# Allegro board LAN9500_TEST_V10A.brd
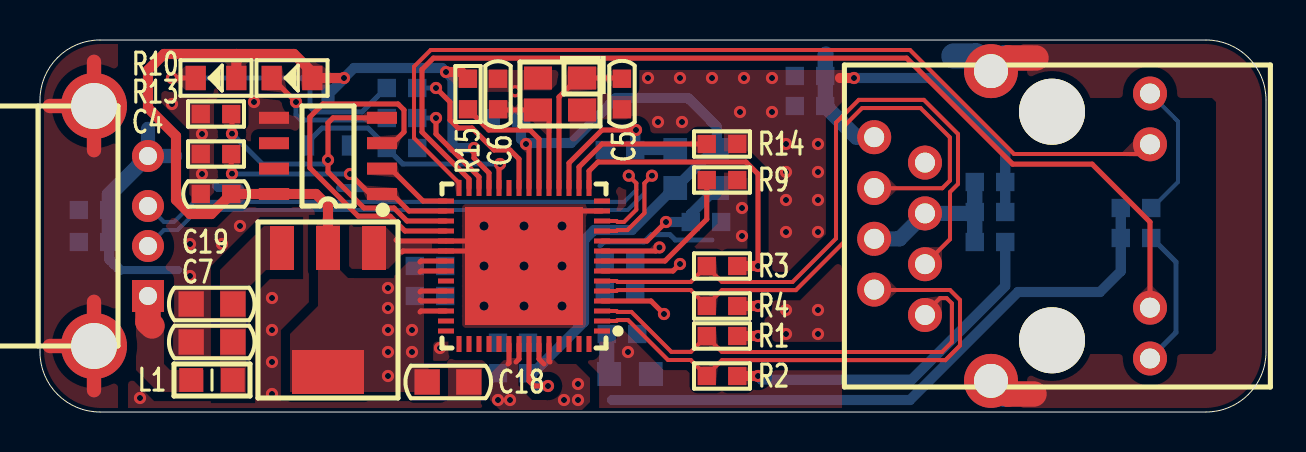
[diagram p0: board, top side]
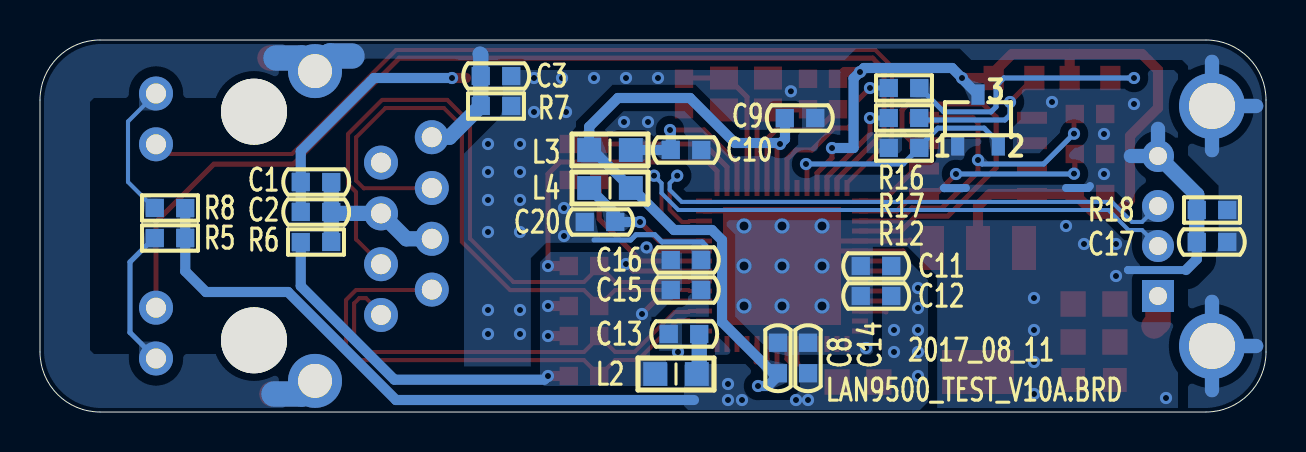
[diagram p1: board, bottom side, seen from below]

Outline 61.3 x 18.6 mm; copper layers: TOP, BOTTOM. Coordinates in mm from the lower left corner of the outline.
Outline path: 0,15.6 0,3 arc(0.88,0.88) 3,0 58.3,0 arc(60.42,0.88) 61.3,3 61.3,15.6 arc(60.42,17.72) 58.3,18.6 3,18.6 arc(0.88,17.72) 0,15.6

## Design rules (mm)
constraint set DEFAULT: min track width 0.203, pair gap 0.203
net group DP1: nets RXN RXP
net group DP2: nets TXN TXP
net group DP3: nets USBDM USBDP

## Placement (name value [footprint] x y rotation side)
C1  0.1uF_50V  [CC0603]  47.5 11.5 180 bottom
C2  1nF_50V  [CC0603]  47.5 10 180 bottom
C3  4.7nF_50V  [CC0603]  38.5 16.8 180 bottom
C4  0.1uF_50V  [CC0603]  8.8 10.9 0 top
C5  12pF_50V  [CC0603]  29.1 15.9 90 top
C6  12pF_50V  [CC0603]  22.9 15.9 270 top
C7  10uF_25V  [CC0805]  8.6 3.5 180 top
C8  0.1uF_50V  [CC0603]  24.4 2.7 270 bottom
C9  0.1uF_50V  [CC0603]  23.3 14.7 0 bottom
C10  0.1uF_50V  [CC0603]  29 13.1 0 bottom
C11  0.1uF_50V  [CC0603]  19.5 7.3 180 bottom
C12  0.1uF_50V  [CC0603]  19.5 5.8 180 bottom
C13  0.1uF_50V  [CC0603]  29.1 3.9 180 bottom
C14  0.1uF_50V  [CC0603]  22.9 2.7 270 bottom
C15  0.1uF_50V  [CC0603]  29 6.1 0 bottom
C16  0.1uF_50V  [CC0603]  29 7.6 0 bottom
C17  4.7nF_50V  [CC0603]  2.7 8.5 0 bottom
C18  10uF_25V  [CC0805]  20.4 1.5 0 top
C19  10uF_25V  [CC0805]  8.6 5.4 180 top
C20  0.1uF_50V  [CC0603]  33.3 9.5 180 bottom
D1  LED_GREEN/NI  [LED0805]  8.8 16.7 180 top
D2  LED_GREEN/NI  [LED0805]  12.6 16.7 180 top
J1  -  [HR911105A]  50.6 9.3 270 top
J2  -  [USB-A-MALE]  5.4 5.8 180 top
L1  BEAD_BLM21PG600  [LC0805]  8.6 1.6 0 top
L2  BEAD_BLM21PG600  [LC0805]  29.5 1.9 0 bottom
L3  BEAD_BLM21PG600  [LC0805]  32.8 13.1 180 bottom
L4  BEAD_BLM21PG600  [LC0805]  32.8 11.2 0 bottom
NOREF  -  []  -0.21 0 0 top
NOREF#2  -  []  0 0 0 top
NOREF#3  -  []  0 0 90 top
R1  49.9R  [RC0603]  34.1 3.8 180 top
R2  49.9R  [RC0603]  34.1 1.8 180 top
R3  49.9R  [RC0603]  34.1 7.3 180 top
R4  49.9R  [RC0603]  34.1 5.3 180 top
R5  309R  [RC0603]  54.8 8.7 180 bottom
R6  0R  [RC0603]  47.5 8.5 0 bottom
R7  10M  [RC0603]  38.5 15.3 180 bottom
R8  309R  [RC0603]  54.8 10.2 180 bottom
R9  12K  [RC0603]  34.1 11.6 180 top
R10  10K/NI  [RC0603]  8.8 14.9 180 top
R12  100K  [RC0603]  18.1 13.2 180 bottom
R13  10K  [RC0603]  8.8 12.9 180 top
R14  12K  [RC0603]  34.1 13.4 180 top
R15  0R  [RC0603]  21.4 15.9 270 top
R16  309R/NI  [RC0603]  18.1 16.2 0 bottom
R17  309R/NI  [RC0603]  18.1 14.7 0 bottom
R18  10M  [RC0603]  2.7 10.1 0 bottom
U1  LAN9500AI-ABZJ-TR  [QFN-56]  24.2 7.3 90 top
U2  MAX809SN293D3T1G  [SOT23_123]  14.4 14.6 180 bottom
U3  AT93C46DN-SH-T/NI  [SOIC8]  14.4 12.8 90 top
U4  AMS1117-3.3  [SOT-223]  14.4 5.1 180 top
Y1  X322525MOB4SI  [X-4P-3R2X2R5-SMD]  26 15.9 180 top

## Library data of the parts
C1-C20 = CAP NP_2
D1 D2 = LED_4
J1 = CON_RJ45_1X8_F_RA_0
J2 = USB-A-MALE
L1-L4 = IND_BEAD_0805_600OHM_200MA
R1-R10 R12-R18 = R_Generic
U1 = LAN9500AI-ABZJ-TR_0
U2 = MAX809_0
U3 = AT93C46DN-SH-T
U4 = AMS1117-3.3
Y1 = X322525MOB4SI

## Footprints (pads in the part's own frame, mm; a bottom-side part is the same pattern mirrored in y, then rotated)
CC0603
  rect 0.914x0.914 smd: 1(-0.762,0) 2(0.762,0)
CC0805
  rect 1.27x1.27 smd: 1(-1.041,0) 2(1.041,0)
HR911105A
  round 3.3 hole 3.3 unplated: (-5.715,0) (5.715,0)
  round 1.699 hole 1.001: 1(4.45,-6.35) 2(3.18,-8.89) 3(1.91,-6.35) 4(0.64,-8.89) 5(-0.63,-6.35) 6(-1.9,-8.89) 7(-3.17,-6.35) 8(-4.44,-8.89) 9(6.625,4.9) 10(4.085,4.9) 11(-4.085,4.9) 12(-6.625,4.9)
  round 2.7 hole 1.7: 13(7.745,-3.05) 14(-7.745,-3.05)
LC0805
  rect 1.194x1.194 smd: 1(-1.041,0) 2(1.041,0)
LED0805
  rect 1.016x1.219 smd: 1(-1.016,0) 2(1.016,0)
QFN-56
  rect 0.25x0.8 smd: 1(-3.25,-3.9) 2(-2.75,-3.9) 3(-2.25,-3.9) 4(-1.75,-3.9) 5(-1.25,-3.9) 6(-0.75,-3.9) 7(-0.25,-3.9) 8(0.25,-3.9) 9(0.75,-3.9) 10(1.25,-3.9) 11(1.75,-3.9) 12(2.25,-3.9) 13(2.75,-3.9) 14(3.25,-3.9) 29(3.25,3.9) 30(2.75,3.9) 31(2.25,3.9) 32(1.75,3.9) 33(1.25,3.9) 34(0.75,3.9) 35(0.25,3.9) 36(-0.25,3.9) 37(-0.75,3.9) 38(-1.25,3.9) 39(-1.75,3.9) 40(-2.25,3.9) 41(-2.75,3.9) 42(-3.25,3.9)
  rect 0.8x0.25 smd: 15(3.9,-3.25) 16(3.9,-2.75) 17(3.9,-2.25) 18(3.9,-1.75) 19(3.9,-1.25) 20(3.9,-0.75) 21(3.9,-0.25) 22(3.9,0.25) 23(3.9,0.75) 24(3.9,1.25) 25(3.9,1.75) 26(3.9,2.25) 27(3.9,2.75) 28(3.9,3.25) 43(-3.9,3.25) 44(-3.9,2.75) 45(-3.9,2.25) 46(-3.9,1.75) 47(-3.9,1.25) 48(-3.9,0.75) 49(-3.9,0.25) 50(-3.9,-0.25) 51(-3.9,-0.75) 52(-3.9,-1.25) 53(-3.9,-1.75) 54(-3.9,-2.25) 55(-3.9,-2.75) 56(-3.9,-3.25)
  rect 5.9x5.9 smd: 57(0,0)
RC0603
  rect 0.914x0.914 smd: 1(-0.762,0) 2(0.762,0)
SOIC8
  rect 0.6x1.5 smd: 1(-1.9,-2.7) 2(-0.63,-2.7) 3(0.64,-2.7) 4(1.91,-2.7) 5(1.91,2.7) 6(0.64,2.7) 7(-0.63,2.7) 8(-1.9,2.7)
SOT23_123
  rect 0.66x1.016 smd: 1(-1.016,-1.27) 2(1.016,-1.27) 3(0,1.27)
SOT-223
  rect 1.2x2.2 smd: 1(-2.3,-3.1) 2(0,-3.1) 3(2.3,-3.1)
  rect 3.6x2.2 smd: 4(0,3.1)
USB-A-MALE
  rect 1.6x1.6 hole 0.9: 1(0,0)
  round 1.6 hole 0.9: 2(0,-2.5) 3(0,-4.5) 4(0,-7)
  round 3.3 hole 2.3: 5(2.7,2.5) 6(2.7,-9.5)
X-4P-3R2X2R5-SMD
  rect 1.4x1.15 smd: 1(-1.1,-0.8) 2(1.1,-0.8) 3(1.1,0.8) 4(-1.1,0.8)

## Nets
GND: C1.1 C2.1 C3.2 C4.1 C5.1 C6.1 C7.2 C8.1 C9.1 C10.1 C11.1 C12.1 C13.1 C14.1 C15.1 C16.1 C17.2 C18.2 C19.2 C20.1 J2.4 R7.2 R9.1 R10.2 R12.1 R13.2 R14.1 R18.2 U1.13 U1.33 U1.34 U1.57 U2.1 U3.5 U4.1 Y1.2 Y1.4
GND_EARTH: C3.1 C17.1 J1.8 J1.13 J1.14 J2.5 J2.6 R7.1 R18.1
VBUS_DET: R15.2 U1.20
VCC-USB: J2.1(VBUS) L1.1
VCC_3V3: C4.2 C11.2 C12.2 C13.2 C14.2 C18.1 D1.1 D2.1 L2.1 R5.2 R8.2 R15.1 U1.25 U1.35 U1.36 U1.38 U1.39 U1.40 U1.48 U1.49 U1.51 U1.52 U2.3(VCC) U3.8(VCC) U4.2 U4.4(OUT_2)
VCC_5V: C7.1 C19.1 L1.2(B) U4.3
VDD33A: C15.2 C16.2 L2.2(B) R1.1 R2.1 R3.1 R4.1 R6.2 U1.4 U1.7 U1.9 U1.15
VDD_CORE: C8.2 C9.2 L3.1 L4.1 U1.21 U1.50
VDDPLL: C20.2 L4.2(B) U1.10
VDDUSBPLL: C10.2 L3.2(B) U1.17
EECLK/PWR_SEL: U1.29 U3.2
EECS: R13.1 U1.30 U3.1
EEDI: U1.32 U3.3
EEDO/AUTOMDIX_EN: R10.1 U1.31 U3.4
NFDX_LED/GPIO8: R17.2 U1.26
NLNKA_LED/GPIO9: J1.10 U1.27
NRESET: R12.2 U1.24 U2.2
NSPD_LED/GPIO10: J1.11 U1.28
RXN: J1.6 R4.2 U1.5
RXP: J1.3 R3.2 U1.6
TXN: J1.2 R2.2 U1.2
TXP: J1.1(TXP1) R1.2 U1.3
USBDM: J2.2 U1.11
USBDP: J2.3 U1.12
XI: C5.2 U1.18 Y1.1
XO: C6.2 U1.19(XO) Y1.3(X2)
N16792268: R9.2 U1.8
N16792367: R14.2 U1.16
N16793057: D1.2(CATHODE) R16.1
N16793060: R16.2 U1.22
N16797773: D2.2(CATHODE) R17.1
N16921144: C1.2 C2.2 J1.4 J1.5 R6.1
N16923033: J1.9 R5.1
N16923631: J1.12 R8.1

Pads without a net: J1 7; U1 1 14 23 37 41 42 43 44 45 46 47 53 54 55 56; U3 6 7

## Via types
v1: diameter 0.61, hole 0.305, TOP to BOTTOM, 77 vias
v2: diameter 0.762, hole 0.457, TOP to BOTTOM, 9 vias

## Routing (per net, layer and track width the routed paths; a pad name or vN(x,y) marks a point on that pad's centre or on a via; arc(x,y) is an arc through that point)
GND: length 50.8
  TOP w0.254: 17.8,8.6 17.85,8.55 U1.33 22.95,8.55 23.45,8.05 ; 23.45,8.05 U1.34 18.15,8.05 18.1,8 ; 23.45,8.05 v2(24.2,7.3) 26.95,10.05 U1.13
  TOP w0.508: v1(40.7,16.7) 40,16.7
  BOTTOM w0.254: 33.6,8.6 31.77,8.6 31.5,8.87 30.57,8.87 30.2,8.5 28.19,8.5 28,8.31
  BOTTOM w0.4: 15,11.2 15.2,11.2 15.21,11.19 16.09,11.19 16.1,11.2 ; 6.9,7.1 6.9,7.1 4,7.1 4,7.1 ; 8.8,11.3 8.9,11.2 10,11.2
  BOTTOM w0.508: C17.2 3.46,7.64 4,7.1 ; v1(40.7,16.7) 44.6,16.7 48.26,13.04 C1.1 C2.1
  BOTTOM w0.711: 5.4,14.16 J2.4 6.76,12.8
  BOTTOM w0.762: C17.2 R18.2 3.46,10.86 J2.4
  vias: v1(5,0.7) v1(6.6,15.4) v1(7.5,8.4) v1(7.5,6.8) v1(8.1,13.9) v1(8.1,11.9) v1(9.1,8.4) v1(10,9.3) v1(10.7,15.5) v1(11.6,5.7) v1(11.6,4.1) v1(11.6,2.5) v1(11.6,0.9) v1(20,3.2) v1(23.75,16.04) v1(29.4,3) v1(30.4,16.7) v1(30.9,14.5) v1(32,16.7) v1(32.1,14.5) v1(33.6,16.7) v1(35,15) v1(35.1,10.2) v1(35.1,8.8) v1(35.2,16.7) v1(36.6,16.7) v1(36.6,15) v1(37.3,13.4) v1(37.3,12) v1(37.3,10.6) v1(37.3,9) v1(37.3,5.1) v1(37.3,3.9) v1(38.9,13.4) v1(38.9,12) v1(38.9,10.6) v1(38.9,9) v1(38.9,5.1) v1(38.9,3.9) v2(22.2,9.3) v2(22.2,7.3) v2(22.2,5.3) v2(24.2,9.3) v2(24.2,5.3) v2(26.1,9.3) v2(26.1,7.3) v2(26.1,5.3)
GND_EARTH: length 43.9
  TOP w0.711: J2.6 2.7,17.51 ; J2.6 0.49,15.3 ; J2.6 2.7,13.09 ; 2.7,1.09 J2.5 ; J2.5 2.7,5.51 ; J2.5 0.49,3.3
  TOP w1.27: 49.8,17.7 48.4,17.7 47.74,17.05 J1.14 ; J1.13 47.74,1.55 48.4,0.9 49.7,0.9
  BOTTOM w0.711: J2.6 2.7,17.51 ; J2.6 2.7,13.09 ; J2.6 0.49,15.3 ; 2.7,1.09 J2.5 ; J2.5 2.7,5.51 ; J2.5 0.49,3.3
  BOTTOM w0.762: 39.3,17.9 39.26,17.86 C3.1 R7.1 40.82,13.74 J1.8
  BOTTOM w1.27: J1.14 47.55,17.05 ; 47.55,17.05 46.8,17.8 45.7,17.8 ; 47.55,17.05 48.2,17.7 49.5,17.7 ; 49.6,0.9 48.2,0.9 47.55,1.55 J1.13
VBUS_DET: length 6.6
  TOP w0.254: R15.2 22.44,14.1 24.5,14.1 24.95,13.65 U1.20
VCC-USB: length 1.6
  TOP w1.27: 5.6,4.3 5.4,4.5 J2.1
VCC_3V3: length 88.8
  TOP w0.254: 25.5,2.5 25.45,2.55 U1.52 ; 19,7.5 19.05,7.55 U1.35 ; 19,6 19.05,6.05 U1.38 ; 19,5.6 19.05,5.55 U1.39 ; 23.4,2.4 23.45,2.45 U1.48 ; U1.36 19.05,7.05 19,7 ; 23.8,2.5 23.95,2.65 U1.49 ; 25.2,2.4 24.95,2.65 U1.51 ; U1.40 19.05,5.05 19,5 ; v1(21.7,13.2) 21.7,12.7 22.45,11.95 U1.25
  TOP w0.508: U4.2 14.4,10.3 13.8,10.9 U3.8 C4.2 8.56,9.9 7.51,9.9 6.8,10.61 6.8,13.8 5.4,15.2 5.4,17.1 6.2,17.9 9.82,17.9 ; 9.82,17.9 D1.1 ; 9.82,17.9 12.7,17.9 13.62,16.98 D2.1 v1(15.2,16.7) ; v1(20.3,17) 21.06,17 R15.1
  BOTTOM w0.508: 28.6,0.6 43.5,0.6 48.9,6 53,6 54.04,7.04 R5.2 R8.2 ; v1(21.7,13.2) 20.62,13.2 20.62,16.68 v1(20.3,17) 20.1,17.2 15.7,17.2 v1(15.2,16.7) 15.2,16.67 U2.3
  BOTTOM w0.762: C13.2 28.34,2.02 L2.1
  vias: v1(17.4,6.2) v1(17.4,5.2) v1(17.4,4.1) v1(17.4,3) v1(17.4,1.8) v1(18.6,4.1) v1(18.6,3) v1(22.9,0.6) v1(23.5,0.6) v1(26.2,0.6) v1(26.9,1.4) v1(26.9,0.6)
VDD33A: length 45.4
  TOP w0.254: U1.4 30.55,5.55 v1(31.2,4.9) ; U1.15 27.45,12.05 27.9,12.5 35.3,12.5 35.9,11.9 v1(35.9,7.3) ; v1(30.97,8.23) 30.8,8.05 U1.9 ; U1.7 31.65,7.05 v1(32,7.4)
  TOP w0.508: R3.1 v1(35.9,7.3) ; R1.1 v1(35.9,3.8) ; R4.1 v1(35.9,5.3) ; R2.1 v1(35.9,1.8)
  BOTTOM w0.508: R6.2 48.26,6.3 43.58,1.62 36.08,1.62 v1(35.9,1.8)
VDD_CORE: length 36.6
  TOP w0.254: U1.50 24.45,1.55 24.7,1.3 v1(25.4,1.3) ; U1.21 24.45,13.25 v1(24.3,13.4)
  BOTTOM w0.508: v1(25.4,1.3) 24.91,1.3 24.4,1.81 C8.2 24.64,1.94 27.2,4.5 27.2,8.59 27.71,9.1 29.6,9.1 31.7,11.2 L4.1 33.66,13.1 L3.1 33.84,14.26 32.4,15.7 28.8,15.7 26.55,13.45 24.35,13.45 v1(24.3,13.4) 24.05,13.65 24.05,14.69 C9.2
VDDPLL: length 7.1
  TOP w0.254: v1(31.3,9.5) 30.35,8.55 U1.10
  BOTTOM w0.508: v1(31.3,9.5) C20.2 32.54,9.9 L4.2
VDDUSBPLL: length 8.3
  TOP w0.254: v1(29.8,14.1) 28.1,14.1 26.45,12.45 U1.17
  BOTTOM w0.508: L3.2 C10.2 29.76,14.06 v1(29.8,14.1)
EECLK/PWR_SEL: length 3.9
  TOP w0.254: U3.2 17.53,12.17 19.15,10.55 U1.29
EECS: length 12.5
  TOP w0.254: v1(15.5,11.9) 16.5,10.9 U3.1 17.6,10.9 18.45,10.05 U1.30 ; R13.1 9.56,11.95 v1(9.6,11.92)
  BOTTOM w0.254: v1(9.6,11.92) 9.62,11.9 v1(15.5,11.9)
EEDI: length 18.2
  TOP w0.254: U3.3 17.64,13.44 18.2,14 18.2,15.1 17.9,15.4 14.14,15.4 13.49,14.75 13.49,12.21 15.91,9.79 17.51,9.79 18.25,9.05 U1.32
EEDO/AUTOMDIX_EN: length 18.7
  TOP w0.254: U1.31 18.35,9.55 17.7,10.2 16.2,10.2 14.4,12 v1(14.4,12.6) 14.4,14.46 14.65,14.71 U3.4 ; R10.1 9.56,14.8 9.6,14.76 v1(9.6,13.92)
  BOTTOM w0.254: v1(14.4,12.6) 14.2,12.4 11.12,12.4 v1(9.6,13.92)
NFDX_LED/GPIO8: length 5.3
  TOP w0.254: U1.26 21.95,11.75 19.8,13.9 v1(19.8,14.7)
  BOTTOM w0.254: v1(19.8,14.7) R17.2
NLNKA_LED/GPIO9: length 51.2
  TOP w0.254: J1.10 55.5,9.5 52.61,12.39 48.63,12.39 43.33,17.69 19.67,17.69 19.1,17.13 19.1,14 21.45,11.65 U1.27
NRESET: length 12.1
  TOP w0.254: v1(23,12.4) 22.95,12.35 U1.24
  BOTTOM w0.254: U2.2 13.38,13.48 14.09,14.19 16.41,14.19 17.34,13.26 R12.2 18.14,12.4 v1(23,12.4)
NSPD_LED/GPIO10: length 46.5
  TOP w0.203: U1.28 20.95,11.45 18.7,13.7 18.7,17.26 19.54,18.1 43.5,18.1 48.7,12.9 55.02,12.9 55.5,13.38
RXN: length 32
  TOP w0.203: U1.5 28.83,6.05 28.87,6.1 32.54,6.1 R4.2 33.34,5.33 34.1,6.09 37.79,6.09 40.21,8.51 40.21,14.3 41.11,15.2 44.03,15.2 45.49,13.73 45.49,11.57 45.11,11.19 41.72,11.19 J1.6
RXP: length 33.6
  TOP w0.203: J1.3 45.5,8.64 45.5,11 45.9,11.4 45.9,13.9 44.19,15.61 40.94,15.61 39.8,14.47 39.8,8.67 37.63,6.5 34.1,6.5 33.34,7.26 R3.2 32.54,6.5 28.87,6.5 28.83,6.55 U1.6
TXN: length 26.5
  TOP w0.203: J1.2 41.73,6.1 45.5,6.1 46,5.6 46,3.33 45.27,2.59 34.1,2.59 33.34,1.83 R2.2 32.54,2.6 31.4,2.6 29.4,4.6 28.87,4.6 28.83,4.55 U1.2
TXP: length 23
  TOP w0.203: J1.1 44.25,4.94 45,5.69 45.33,5.69 45.59,5.43 45.59,3.49 45.1,3 34.1,3 33.34,3.76 R1.2 32.54,3.01 31.57,3.01 29.57,5 28.87,5 28.83,5.05 U1.3
USBDM: length 31.5
  TOP w0.203: v1(30.6,11.82) 30.22,11.44 30.22,9.95 29.37,9.1 28.87,9.1 28.83,9.05 U1.11
  BOTTOM w0.203: J2.2 6.2,9.1 6.87,9.1 7.87,10.1 29.38,10.1 30.22,10.94 30.22,11.44 v1(30.6,11.82)
USBDP: length 30.1
  TOP w0.203: U1.12 28.83,9.55 28.87,9.5 29.2,9.5 29.82,10.12 29.82,11.44 v1(29.44,11.82)
  BOTTOM w0.203: v1(29.44,11.82) 29.82,11.44 29.82,11.11 29.21,10.51 7.71,10.51 6.7,9.5 6.2,9.5 J2.3
XI: length 8.1
  TOP w0.254: C5.2 29.06,16.7 Y1.1 26.9,16.7 25.95,15.75 U1.18
XO: length 6.3
  TOP w0.254: C6.2 22.94,15.1 Y1.3 25.1,15.1 25.45,14.75 U1.19
N16792268: length 8.1
  TOP w0.254: U1.8 31.25,7.55 33.34,9.64 R9.2
N16792367: length 7.9
  TOP w0.254: R14.2 28.1,13.4 26.95,12.25 U1.16
N16793057: length 13.7
  TOP w0.254: v1(6.6,16.7) D1.2
  BOTTOM w0.254: R16.1 17.3,16.2 16.11,15.01 13.75,15.01 13.5,15.25 13.5,16.3 13.1,16.7 v1(6.6,16.7)
N16793060: length 8.5
  TOP w0.254: v1(19.8,16.2) 20.5,15.5 20.5,14.6 20.9,14.2 21.6,14.2 22.7,13.1 23.5,13.1 23.95,12.65 U1.22
  BOTTOM w0.254: R16.2 v1(19.8,16.2)
N16797773: length 7
  TOP w0.254: v1(12.8,15.5) 11.6,16.7 D2.2
  BOTTOM w0.254: v1(12.8,15.5) 12.8,14.85 13.05,14.6 17.24,14.6 R17.1
N16921144: length 8.6
  BOTTOM w0.762: J1.4 42.98,8.66 J1.5 46.67,9.93 C2.2 ; C2.2 C1.2 ; C2.2 R6.1
N16923033: length 7.1
  BOTTOM w0.254: J1.9 56.8,3.98 56.8,7.5 55.6,8.7 R5.1
N16923631: length 6.9
  BOTTOM w0.203: R8.1 55.6,10.2 56.9,11.5 56.9,14.53 J1.12

## Copper pours and planes (outline as drawn; the poured copper is in the pictures)
GND on TOP: 4.4,0.2 40.1,0.2 40.1,17.1 4.6,17.1 4.4,16.9 ; 8 cut-outs
GND on BOTTOM: 4.4,0.2 40.1,0.2 40.1,17.1 4.6,17.1 4.4,16.9 ; 1 cut-out
GND_EARTH on TOP: 47.6,0.2 58.3,0.2 60.26,1.04 61.1,3 61.1,15.6 60.25,17.55 58.3,18.4 47.5,18.4 47.5,15.7 58.6,15.7 58.8,15.5 58.8,3.1 58.6,2.9 47.6,2.9
GND_EARTH on BOTTOM: 3,0.2 1.04,1.04 0.2,3 0.2,15.6 1.05,17.55 3,18.4 58.3,18.4 60.25,17.55 61.1,15.6 61.1,3 60.26,1.04 58.3,0.2 47.6,0.2 47.6,2.9 58.6,2.9 58.8,3.1 58.8,15.5 58.6,15.7 47,15.7 45.1,17.6 4.2,17.6 3.9,17.3 3.9,0.2
VCC-USB on TOP: 4.8,4.8 4.8,2.1 5.9,1 8.2,1 8.2,2.1 6.5,2.1 6.2,2.4 6.2,4.8
VCC_3V3 on TOP: 23.3,2.7 22.5,1.9 22.5,0.6 23,0.1 27.1,0.1 27.5,0.5 27.5,1.7 26.8,2.4 25.9,2.4 25.6,2.7 24.9,2.7 24.8,2.6 24.8,1.9 25.5,1.2 25.5,0.7 25.4,0.6 24.6,0.6 24.1,1.1 24.1,2.7
VCC_3V3 on TOP: 12.5,1 12.5,3.9 13.9,5.3 13.9,9.4 15,9.4 15,7.1 15.4,6.7 17.6,6.7 18.6,7.7 19.2,7.7 19.2,2.4 19.5,2.1 19.9,2.1 19.9,1
VCC_3V3 on BOTTOM: 17.3,0.1 16.9,0.5 16.9,6.6 18.1,7.8 19.2,7.8 19.2,2.8 19.6,2.4 23.3,2.4 23.3,1.1 23.8,0.6 25.3,0.6 25.5,0.8 25.5,2.4 29.1,2.4 29.1,0.3 28.9,0.1
VCC_5V on TOP: 9,0.9 10.3,0.9 10.3,6.1 11.3,7.1 12.7,7.1 12.7,9.3 11.2,9.3 9,7.1
VDD33A on BOTTOM: 30.8,8.5 31.1,8.5 31.6,8 35.8,8 36.3,7.5 36.3,1.5 36.1,1.3 29.9,1.3 29.9,2.4 30,2.5 30,2.6 30.6,2.6 30.8,2.8 30.8,4.5 29.2,6.1 29.2,8.1 30.4,8.1
GND_EARTH on TOP: 3.9,0.2 3,0.2 1.04,1.04 0.2,3 0.2,15.6 1.05,17.55 3,18.4 3.9,18.4

Small or netless copper shapes (teardrops, artwork), in the pictures only: 68 on TOP, 44 on BOTTOM

## Text on the board
Ref Des/Silkscreen Bottom: 2017_08_11 | LAN9500_TEST_V10A.BRD
BODY_CENTER: SCALE: NONE | If the angle of PCB board outline is circular,please use this kind of break out area | If not use it,please delete it before you gerber out | If the angle of PCB board outline is right angle,please use this kind of break out area | AS usual,please use the 0.8MM stamp Via | A_TARGET:1.53 mm | ___ PUBI (PUBLIC INFORMATION) | ___ FIUO (HY INTERNAL USE ONLY) | ___ FCP (HY CONFIDENTIAL PROPRIETARY) | THIS DOCUMENT CONTAINS INFORMATION | PROPRIETARY TO FREESCALE AND SHALL | NOT BE USED FOR ENGINEERING DESIGN | PROCUREMENT OR MANUFACTURE IN WHOLE | OR IN PART WITHOUT THE CONSENT OF | NXP. | 1. THIS DRAWING SPECIFIES THE REQUIREMENTS FOR A | 2. THE PWB MUST BE LEAD FREE ASSEMBLY PROCESS COMPATIBLE AND MUST BE ABLE TO HANDLE | 3. BASE MATERIAL - LAMINATE AND PREPREG SHALL MEET IPC-4101B-26, 83 or 98 | Tg - MUST BE GREATER THAN OR EQUAL TO 150 DEGREES CELSIUS. | Td - MUST BE GREATER THAN OR EQUAL TO 330 DEGREES CELSIUS. | 4. COPPER FOIL WEIGHT - SEE STACKUP DETAIL 'A' | 5. CHARACTERISTIC IMPEDANCE - SEE DETAIL 'B' | 6. MINIMUM CONDUCTIVE WIDTH/SPACING TO BE .00X"/.00X" | 7. PLATING FINISH - BOTH SIDES ENIG (ELECTROLESS NICKEL IMMERSION GOLD): | 8. ALL THROUGH HOLE VIAS MAY BE PLATED SHUT. | - MUST BE UL RECOGNIZED AND MUST HAVE AN ID THAT CONFORMS TO UL94V-0 | 9. SOLDERMASK - GREEN COLOR (TAIYO OR EQUIVALENT), BOTH SIDES. | 10. SILKSCREEN - WHITE EPOXY INK, BOTH SIDES.  NO SILK ON PADS. | 11. ELECTRICAL TEST - 100% IPCD356. | 12. PRINTED WIRING BOARD IS TO BE INDIVIDUALLY BAGGED. | 13. DRC'S MUST BE RUN ON THE GERBER BEFORE BUILDING BOARDS, | UNLESS PRIOR APPROVAL IS GIVEN IN WRITING BY FREESCALE. | 14. ADD TEARDROPS TO ALL SIGNAL LAYERS. | 15. SOLDER SAMPLES TO BE PROVIDED. | 16. BASIC GRID INCREMENT AT 1:1 IS .0001. | 17. SUPPLIER MARKINGS - ON SOLDER SIDE ONLY, WHERE SHOWN. | MODIFICATION OF SOLDERMASK IS NOT ALLOWED WITHOUT WRITTEN PERMISSION FROM FREESCALE. | WITH SPECIFICATION IPC-A-600 CLASS 2 (LATEST REVISION). | A MINIMUM OF 5 CYCLES AT 260 DEGREES CELSIUS FOR 10 SECONDS. | 18. THE PWB WILL BE MARKED AS LEAD FREE BY USE OF AN INK STAMP Pb | 19. THE PWB WILL BE MARKED AS LEAD FREE PROCESS COMPATIBLE BY USE OF AN INK STAMP 260 C | 21. FINISHED PCB MUST BE PANELIZED FOR ASSEMBLY ACCORDING TO CONTRACT MANUFACTURING REQUIREMENT. | ADDITION OF .25" RAILS AND .125" NON-PLATED TOOLING HOLES ARE AT THE DISCRETION | OF CONTRACT MANUFACTURER AND FAB HOUSE. | PANELIZATION MUST BE APPROVED BY FREESCALE. | 2.540-6.350 MICRON (100-250 MICROINCH) OF NICKEL. | .05080-.232 MICRON (2-8 MICROINCH) OF GOLD OVER | PRINTED WIRING BOARD IN ACCORDANCE | NO.2, XinYe Road, West High-Tech Zone, ChengDu, Sichuan | 20. ALL PLATED AND NON-PLATED THROUGH HOLES ARE TO BE DRILLED AT PRIMARY DRILL STEP. | ALL HOLE LOCATION TOLERANCES ARE TO BE +/-.002 IN REFERENCE TO THE PRIMARY DATUM. | X | XXXLZJXXX | V10A | 18-10-01 | JLC:  1.6mm THK +/- 10% | LAYER 1  TOP SIDE          1oz+plating | LAYER 2  BOTTOM SIDE       1oz+plating | FINISHED Cu WEIGHT | NO-***** | 1/1 | CAD-***** | 1 | DETAIL A | LAYER STACKUP | DETAIL B | IMPEDANCE REQUIREMENTS | IMPEDANCE TOLERANCE IS 10% | LAN9500_TEST_V10A | FAB-***** | A2 | HYOC
DISPLAY_TOP: FIGURE | FINISHED_SIZE | 0.3048 | 0.4572 | 0.9 | 1.0008 | 1.7 | 2.3 | 3.3 | DRILL CHART: TOP to BOTTOM | ALL UNITS ARE IN MILLIMETERS | PLATED | NON-PLATED | QTY | 77 | 9 | 4 | 12 | 2 | 108 | TOTAL HOLES:
